# EAGLE board psu (EAGLE 7.2.0)
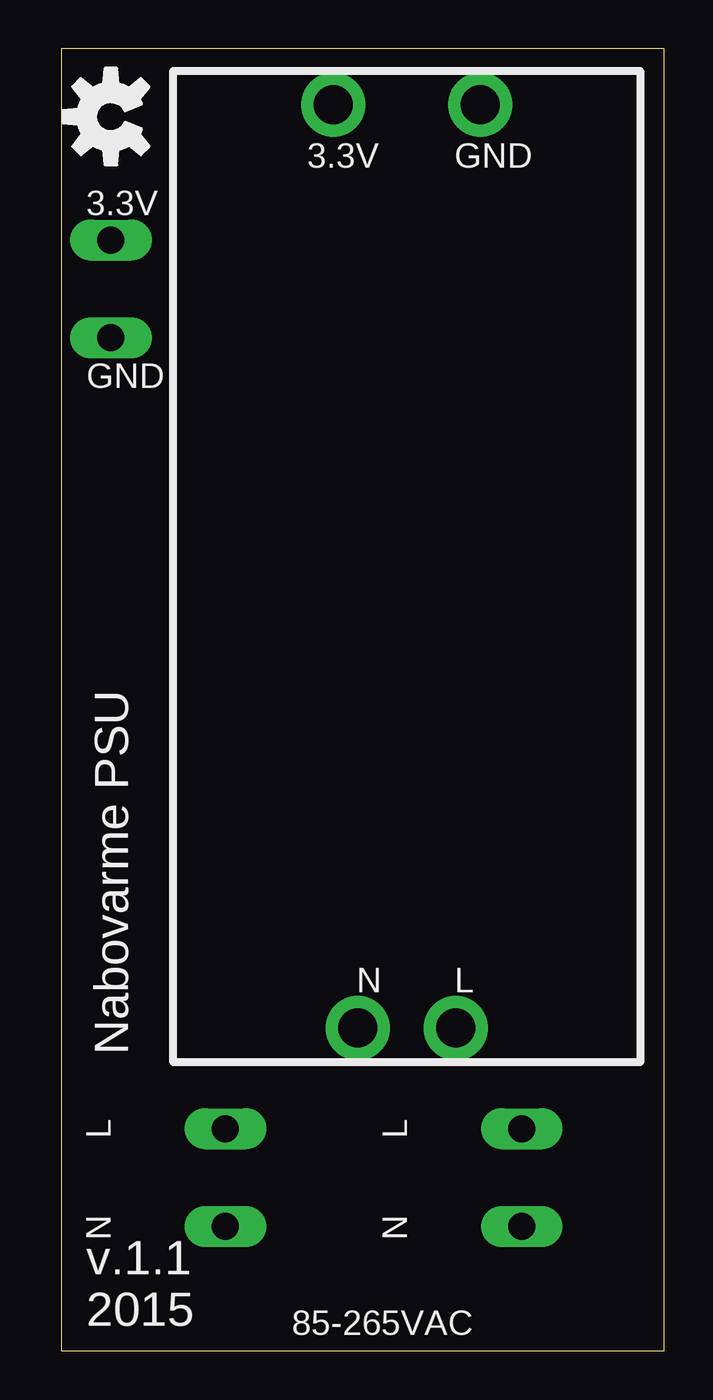
[diagram p0: board, top side]
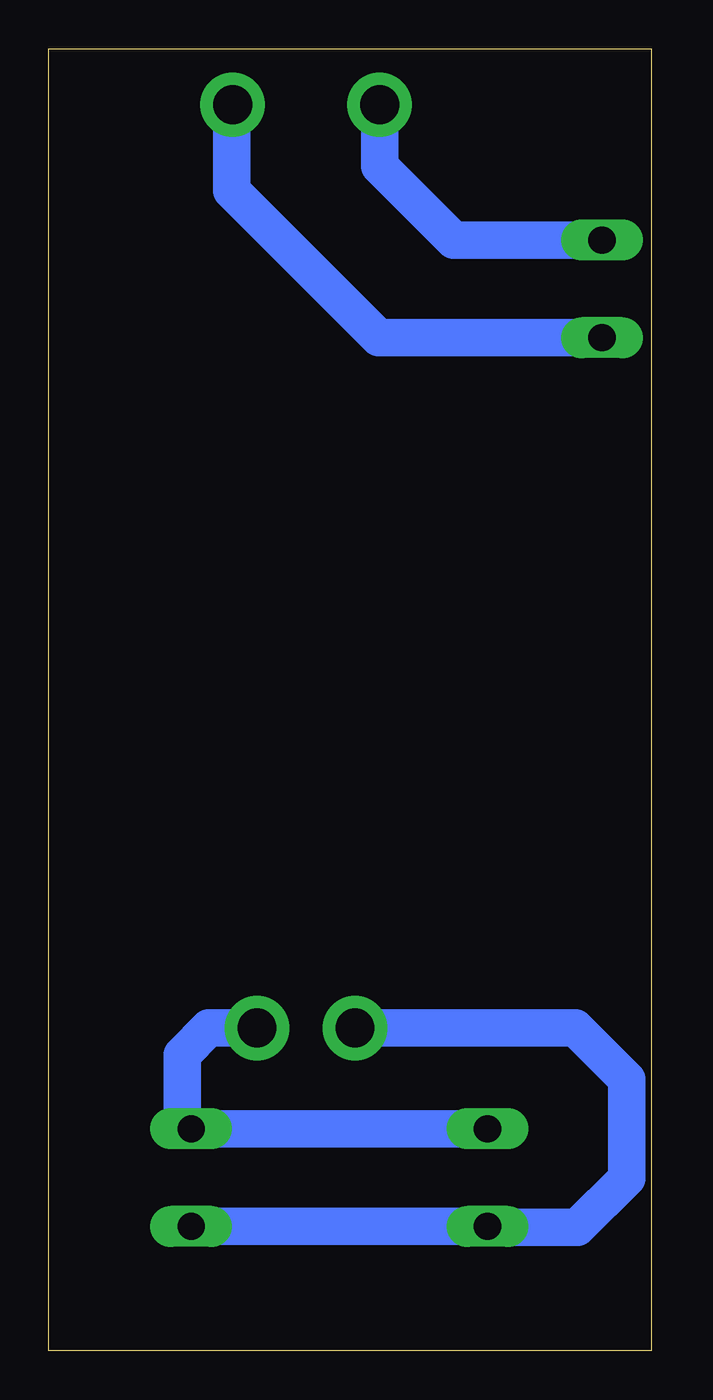
[diagram p1: board, bottom side, seen from below]

Size 31 x 67 mm. Coordinates in mm from the lower left corner, seen from the top.
Outline: 0,0 31,0 31,67 0,67 0,0
Copper layers (1*16): Top 0.035mm / dielectric 1.5mm / Bottom 0.035mm
Design rules "default": minimum track width 10mil, minimum drill 24mil, track to track 8mil, track to pad 8mil, pad to pad 8mil, via to via 8mil, smd to smd 8mil, copper to edge 40mil, drill to drill 8mil, minimum pad ring 10mil, minimum via ring 8mil, stop-mask expansion 4mil, vias tented up to drill 0mil, thermal gap 10mil

## Footprints (pad centres in the part's own frame; a part is rotated, then mirrored left to right if it is on the bottom)
1X01_2MM = drill 2 pad 3.302: 1 0,0
1X02_LONGPADS = drill 1.4 pad 1.93 long: 1 0,0; 2 5.02,0

## Placement (x,y rotation side)
3.3V  M01PTH_2MM  [1X01_2MM]  13.98,64.11 0 top
85-265VAC  [1X02_LONGPADS]  23.67,11.43 270 top
85-265VAC1  [1X02_LONGPADS]  8.43,11.43 270 top
GND  M01PTH_2MM  [1X01_2MM]  21.54,64.11 0 top
JP2  [1X02_LONGPADS]  2.54,57.15 270 top
L  M01PTH_2MM  [1X01_2MM]  20.28,16.61 0 top
N  M01PTH_2MM  [1X01_2MM]  15.24,16.61 0 top
U$1  [OSHW-LOGO-M]  2.54,63.5 90 top

## Library data of the parts
3.3V 85-265VAC 85-265VAC1 GND JP2 L N = SparkFun (old)
U$1 = SparkFun-Aesthetics

## Nets
N$1: 85-265VAC1.1 85-265VAC.1 L.1
N$2: 85-265VAC1.2 85-265VAC.2 N.1
N$3: 3.3V.1 JP2.1
N$4: GND.1 JP2.2

## Tracks (layer width: path | path; a pad name or v marks a point on that pad's centre or on a via)
N$1
  Bottom 1.93: 85-265VAC1.1 85-265VAC.1 24.13,11.89 24.13,15.24 22.76,16.61 L.1
N$2
  Bottom 1.93: N.1 3.91,16.61 1.27,13.97 1.27,8.89 3.81,6.35 8.37,6.35 85-265VAC1.2 85-265VAC.2
N$3
  Bottom 1.93: JP2.1 10.16,57.15 13.97,60.96 3.3V.1
N$4
  Bottom 1.93: JP2.2 14.03,52.13 21.59,59.69 21.59,64.06 GND.1

## Text on the board
tNames: 3.3V | GND | Nabovarme PSU | L | L | N | N | v.1.1 / 2015